# Altium PCB pcb.PcbDoc
Units mm, origin at the board's own origin, x right, y up, seen from the top; angles counter-clockwise.
Board outline 52.12 x 98.78 mm, 2 copper layers (Top Layer, Bottom Layer); 27 components, 29 nets, 152 pads, 14 vias.
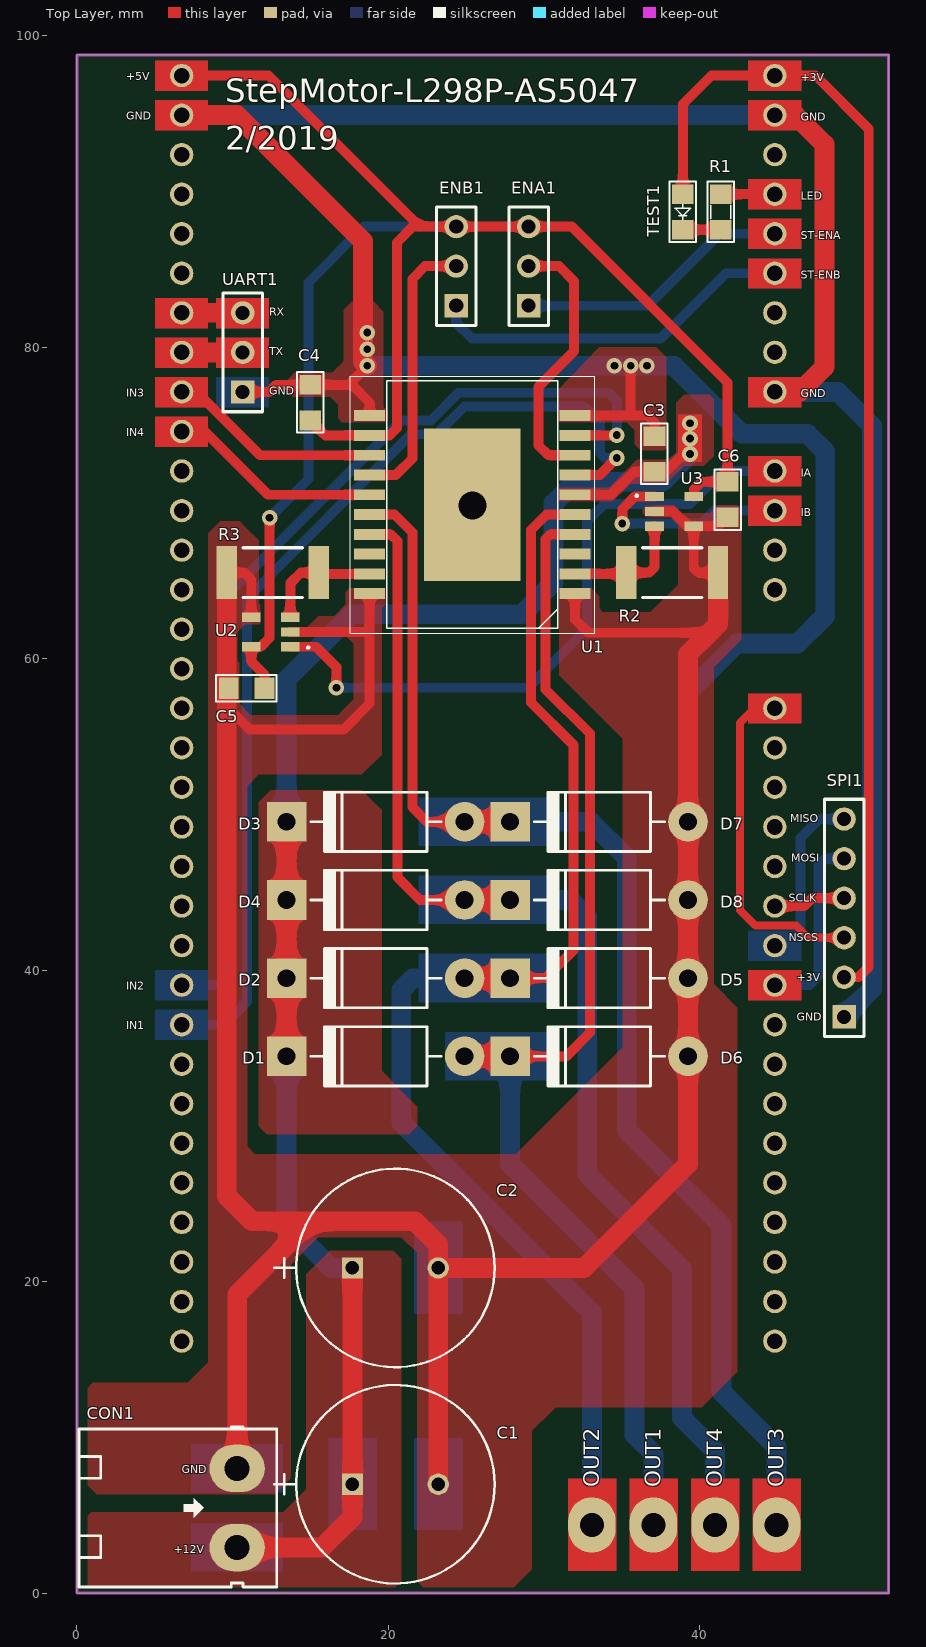
[diagram p0: Top Layer view]
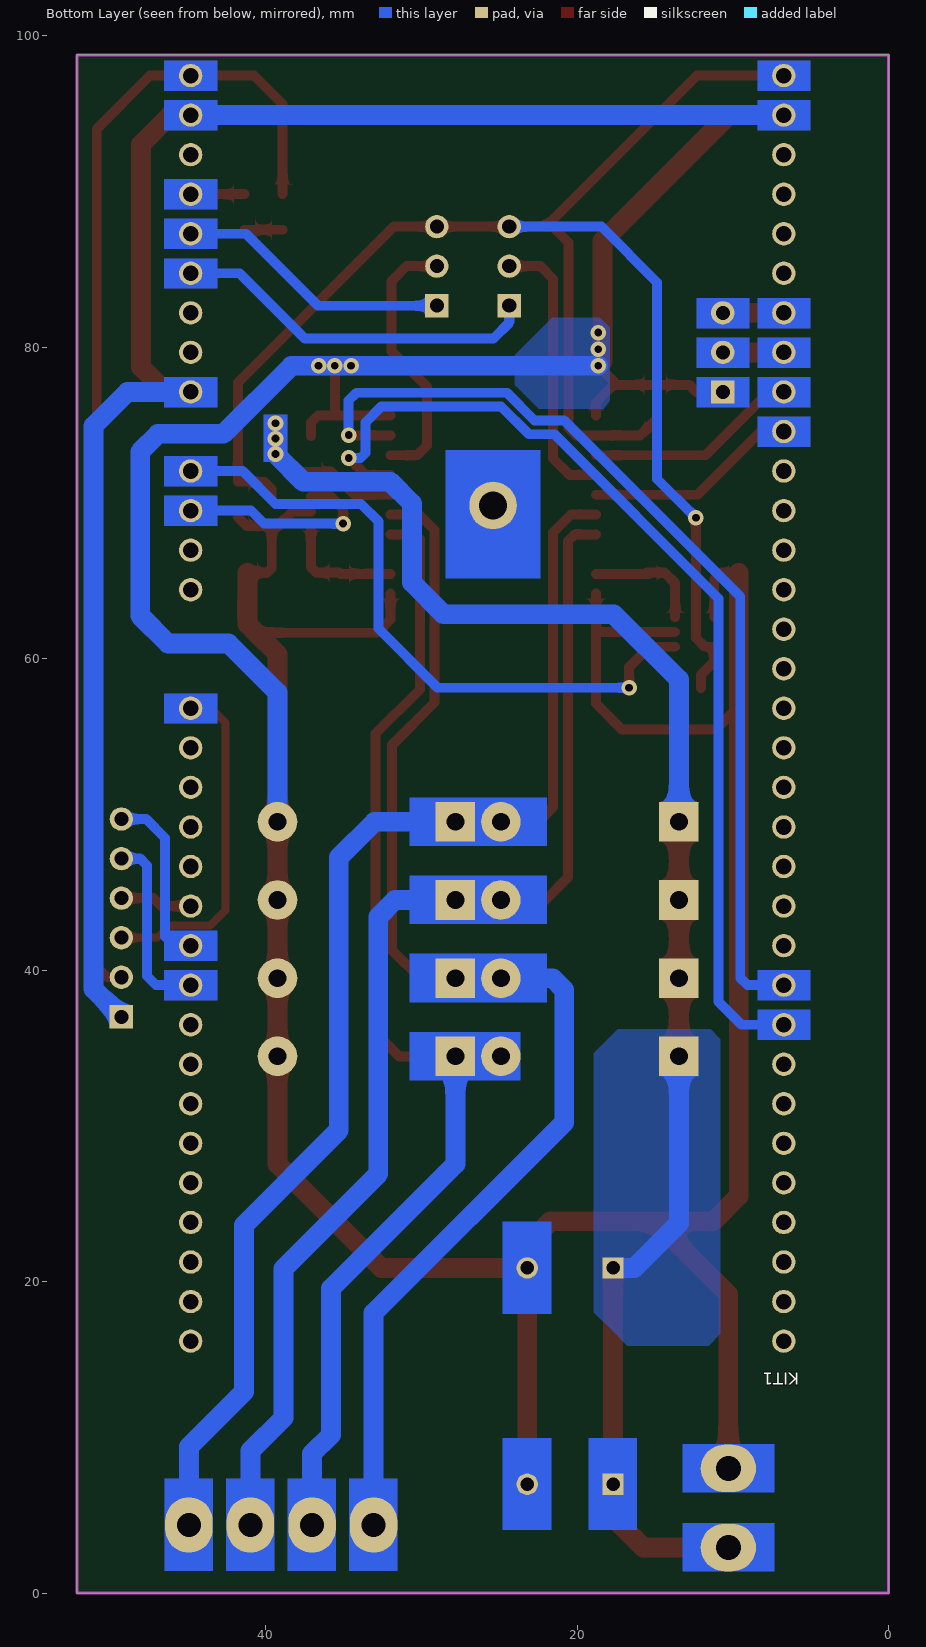
[diagram p1: Bottom Layer view, seen from below]
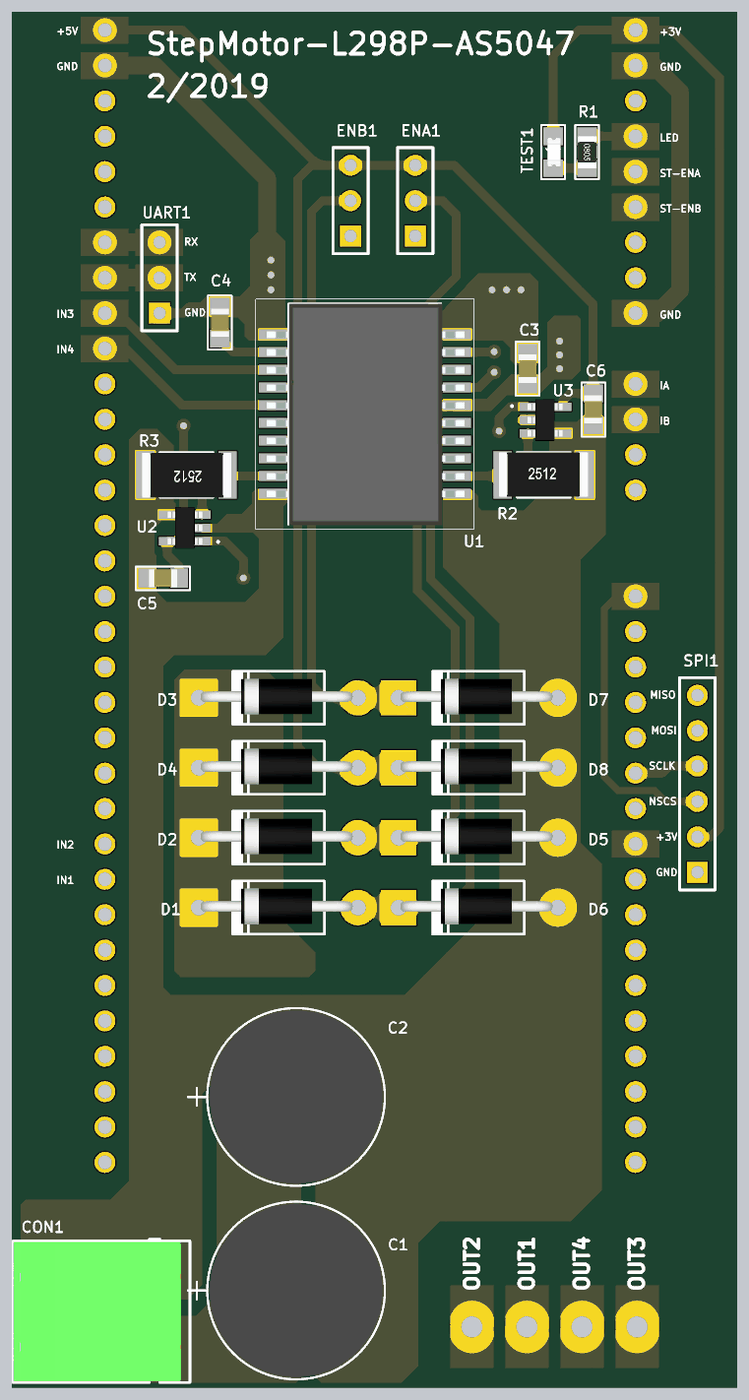
[diagram p2: 3D render of the assembled board from above, using the file's embedded part models]

## Layer stack, top to bottom
Top Solder: solder mask 0.0102, Solder Resist, Dk 3.5
Top Layer: signal copper 0.0356
Dielectric 1: dielectric 0.32, FR-4, Dk 4.8
Bottom Layer: signal copper 0.0356
Bottom Solder: solder mask 0.0102, Solder Resist, Dk 3.5

## Board outline
0,0 52.121,0 52.121,98.781 0,98.781

## Design rules (kind name [scope] priority, off if disabled: settings)
Clearance [All] p1: gap=0.254
PolygonConnect [All] p1: connectstyle=Direct reliefconductorwidth=0.254 reliefentries=4 polygonreliefangle="90 Angle" airgapwidth=0.254
RoutingVias [All] p1: holewidth=0.711 width=1.27 viastyle="Through Hole" minholewidth=0.5 minwidth=0.2 maxholewidth=1 maxwidth=2
SilkToSolderMaskClearance [IsPad] p1: minsilkscreentomaskgap=0.025 clearancetoexposedcopper=TRUE
SolderMaskExpansion [All] p1: expansion=0.102
Width [All] p1: maxlimit=2.54 minlimit=0.254 preferedwidth=0.508
29 further rules are at their usual default settings.

## Components (designator, comment, footprint, x,y, rotation, side; value= is the part's Value field where it differs from the comment)
C1 "390uF" "CAP_12.5 X 25" 20.447,6.985 r0 top
C2 "390uF" "CAP_12.5 X 25" 20.447,20.879 r0 top
C3 "104" TU_SMD_0805 37.084,73.152 r270 top
C4 "104" TU_SMD_0805 14.986,76.454 r270 top
C5 "104" TU_SMD_0805 10.897,58.115 r0 top
C6 "104" TU_SMD_0805 41.783,70.231 r90 top
CON1 "CON 2 EDG 5.08_MH" "CON 2 EDG 5.08" 10.287,5.461 r270 top
D1 "FR107" D2A 19.177,34.468 r180 top
D2 "FR107" D2A 19.177,39.489 r180 top
D3 "FR107" D2A 19.177,49.53 r180 top
D4 "FR107" D2A 19.177,44.509 r180 top
D5 "FR107" D2A 33.528,39.489 r180 top
D6 "FR107" D2A 33.528,34.468 r180 top
D7 "FR107" D2A 33.528,49.53 r180 top
D8 "FR107" D2A 33.528,44.509 r180 top
ENA1 "Jump 3" "Jump 3" 29.007,85.217 r90 top
ENB1 "Jump 3" "Jump 3" 24.359,85.217 r90 top
KIT1 "STM32F0DISCOVERY" STM32F0DISCOVERY 24.502,56.82 r270 bottom locked
R1 "1K" "Tro SMD 0805" 41.351,88.697 r270 top
R2 "0.002" 2512_R 38.227,65.532 r0 top
R3 "0.002" 2512_R 12.573,65.532 r180 top
SPI1 "Jump 6" "Jump 6" 49.267,43.358 r90 top
TEST1 "LED" LED_0805 38.913,88.697 r270 top
U1 "L298P" SOIC127P1420X360-21N 25.391,69.901 r180 top
U2 "INA180A" SOT95P280X145-5N 12.446,61.722 r180 top
U3 "INA180A" SOT95P280X145-5N 38.354,69.469 r0 top
UART1 "Jump 3" "Jump 3" 10.643,79.68 r90 top

## Footprints (in the part's own frame and the unit in brackets; to place one, negate y for a bottom-side part, rotate by r counter-clockwise, add the part's x,y. Pads: shape width x height; smd on the part's side, far side on the other; paste and mask are expansions set on the pad)
2512_R [mm] "Chip Resistor, Body 6.3x3.2mm, IPC Medium Density"
  rect 1.3x3.4 smd: 1(2.95,0) 2(-2.95,0)
  silkscreen extent -1.9,-1.6 1.9,1.6, body extent -3.23,-1.57 3.17,1.63, height 0.6
"CAP_12.5 X 25" [mil]
  rect 54x54 hole 34 mask-1000: 1(-108.5,0)
  round 54 hole 34 mask-1000: 2(108.5,0)
  silkscreen extent -306,-251 251,251, body extent -246,-246 245,246, height 984
"CON 2 EDG 5.08" [mil]
  oval 120x140 hole 62.99: 1(-100,0) 2(100,0)
  silkscreen extent -205,-400 200,100, body extent -197,-399 197,73, height 334
D2A [mil] "Diode 2A, W 150mil, L 450mil"
  round 100 hole 45: 1(-225,0)
  rect 100x100 hole 45: 2(225,0)
  silkscreen extent -166,-75 164,75, body extent -210,-54 220,47, height 100
"Jump 3" [mm] "Jump 3P 2.54"
  rect 1.5x1.5 hole 0.9: 1(-2.54,0)
  round 1.5 hole 0.9: 2(0,0) 3(2.54,0)
  silkscreen extent -3.81,-1.27 3.81,1.27, body extent -3.81,-1.27 3.81,1.27, height 7
"Jump 6" [mm]
  rect 1.5x1.5 hole 0.9: 1(-6.35,0)
  round 1.5 hole 0.9: 2(-3.81,0) 3(-1.27,0) 4(1.27,0) 5(3.81,0) 6(6.35,0)
  silkscreen extent -7.62,-1.27 7.62,1.27, body extent -7.62,-1.27 7.62,1.27, height 7
LED_0805 [mil]
  rect 50x55 smd: 1(-45,0) 2(45,0)
  silkscreen extent -77,-34 76,33, body extent -41,-16 41,20, height 33
SOIC127P1420X360-21N [mm]
  rect 2x0.7 smd: 1(-6.6,5.715) 2(-6.6,4.445) 3(-6.6,3.175) 4(-6.6,1.905) 5(-6.6,0.635) 6(-6.6,-0.635) 7(-6.6,-1.905) 8(-6.6,-3.175) 9(-6.6,-4.445) 10(-6.6,-5.715) 11(6.6,-5.715) 12(6.6,-4.445) 13(6.6,-3.175) 14(6.6,-1.905) 15(6.6,-0.635) 16(6.6,0.635) 17(6.6,1.905) 18(6.6,3.175) 19(6.6,4.445) 20(6.6,5.715)
  rect 6.2x9.8 smd: 21(0,0)
  silkscreen extent -7.85,-8.25 7.85,8.25, body extent -7.15,-7.92 7.05,7.98, height 3.6
SOT95P280X145-5N [mm]
  rect 1.21x0.59 smd: 1(-1.255,0.95) 2(-1.255,0) 3(-1.255,-0.95) 4(1.255,-0.95) 5(1.255,0.95)
  silkscreen extent -2.47,0.93 -2.33,1.07, body extent -1.28,-1.5 1.22,1.5, height 1.11
STM32F0DISCOVERY [mm]
  round 1.5 hole 1: 1(-40.64,-20.32) 2(-38.1,-20.32) 3(-35.56,-20.32) 4(-33.02,-20.32) 5(-30.48,-20.32) 6(-27.94,-20.32) 7(-25.4,-20.32) 8(-22.86,-20.32) 9(-20.32,-20.32) 11(-15.24,-20.32) 12(-12.7,-20.32) 13(-10.16,-20.32) 14(-7.62,-20.32) 17(0,-20.32) 18(2.54,-20.32) 19(5.08,-20.32) 20(7.62,-20.32) 21(10.16,-20.32) 22(12.7,-20.32) 23(15.24,-20.32) 24(17.78,-20.32) 25(20.32,-20.32) 26(22.86,-20.32) 27(25.4,-20.32) 28(27.94,-20.32) 29(30.48,-20.32) 30(33.02,-20.32) 31(35.56,-20.32) 32(38.1,-20.32) 33(40.64,-20.32) 34(-40.64,17.78) 35(-38.1,17.78) 36(-35.56,17.78) 37(-33.02,17.78) 38(-30.48,17.78) 39(-27.94,17.78) 40(-25.4,17.78) 41(-22.86,17.78) 42(-20.32,17.78) 43(-17.78,17.78) 44(-15.24,17.78) 45(-12.7,17.78) 46(-10.16,17.78) 47(-7.62,17.78) 48(-5.08,17.78) 49(-2.54,17.78) 50(0,17.78) 51(2.54,17.78) 52(5.08,17.78) 53(7.62,17.78) 54(10.16,17.78) 55(12.7,17.78) 56(15.24,17.78) 57(17.78,17.78) 58(20.32,17.78) 59(22.86,17.78) 60(25.4,17.78) 61(27.94,17.78) 62(30.48,17.78) 63(33.02,17.78) 64(35.56,17.78) 65(38.1,17.78) 66(40.64,17.78)
  body extent -41.88,-21.59 41.94,19.05, height 7
"Tro SMD 0805" [mil]
  rect 50x55 smd: 1(-45,0) 2(45,0)
  silkscreen extent -77,-34 76,33, body extent -45,-27 45,27, height 28
TU_SMD_0805 [mil]
  rect 50x55 smd: 1(-45,0) 2(45,0)
  silkscreen extent -77,-34 76,33, body extent -40,-25 40,25, height 24

## Part data
C1 C2: library part "Capacitor TuHoa", "CAP ALUM 390UF 20% 50V RADIAL"
C3 C4 C5 C6: library part "Capacitor 0805", "Ceramic Chip Capacitor - Standard"
CON1: "CON 2 EDG 5.08 (xanh cong)"
D1 D2 D3 D4 D5 D6 D7 D8: library part "Diode 1N4148 DO35 450mA 100V ( 1N4148 DIP)_MH", "Diode 1N4148 DO35 450mA 100V ( 1N4148 DIP)"
ENA1 ENB1 UART1: "Jump 3P 2.54"
R1 R2 R3: library part "R nho", "RES, 100, 1%, 0.1 W, 0402"
SPI1: "Jump 6P 2.54"
TEST1: library part "LED SMD_0805_MH", "LED 3mm"

## Free pads (board coordinates)
  round 3.048 hole 1.778: 0(25.4,69.85)
  oval 3.048x3.556 hole 1.524: 0(33.071,4.369) 0(37.025,4.369) 0(40.979,4.369) 0(44.933,4.369)

## Via types
v1: diameter 1, hole 0.5, Top Layer to Bottom Layer, tented both sides, 14 vias

## Nets (pads, with @x,y where several pads share a name; then routed paths per layer and width w, separated by ;. In a path a pad name is that pad's centre, name@x,y a point inside that pad or via, vN(x,y) a via of type N, cw(c..) or ccw(c..) an arc to the next point about the centre after c; other vN are vias at no path point)
+3V: KIT1.1 SPI1.2 TEST1.1 | length 75.6
  Top Layer w0.635: TEST1.1 38.913,95.631 40.742,97.46 KIT1.1 47.422,97.46 50.851,94.031 50.851,40.208 50.19,39.548 SPI1.2
+5V: C4.2 C5.2 C6.2 ENA1.3 ENB1.3 KIT1.34 U1.12 U2.5 U3.5 | length 111.7
  Top Layer w0.635: KIT1.34 12.294,97.46 21.996,87.757 ; C5.2 12.04,58.979 11.191,59.827 U2.5 11.801,60.772 12.368,61.339 v1(12.368,69.06) ; C4.2 15.951,74.346 U1.12 20.074,74.346 20.549,74.82 20.549,86.741 21.565,87.757 21.996,87.757 ; U3.5 39.609,70.876 40.107,71.374 C6.2 41.783,77.749 31.775,87.757 ENA1.3 ENB1.3 21.996,87.757
  Bottom Layer w0.635: v1(12.368,69.06) 14.859,71.552 14.859,84.176 18.44,87.757 ENB1.3
+12V: C1.1 C2.1 C3.2 CON1.2 D1.2 D2.2 D3.2 D4.2 U1.6 | length 111.8
  Top Layer w0.635: U1.6 34.29,70.536 35.763,72.009 C3.2 37.795,72.009 39.7,73.914 v1@39.7,75.133
  Top Layer w1.27: CON1.2 15.748,2.921 17.691,4.864 C1.1 C2.1 ; D1.2 D2.2 D4.2 D3.2
  Bottom Layer w0.635: v1@39.7,73.152 v1@39.7,75.133
  Bottom Layer w1.27: D1.2 13.462,23.749 16.332,20.879 C2.1 ; D3.2 13.462,58.674 17.653,62.865 28.575,62.865 30.607,64.897 30.607,69.977 32.004,71.374 37.592,71.374 v1(39.37,73.152)
  other v1: 39.37,74.143 39.37,75.133
ENA: ENA1.2 U1.8 | length 17.4
  Top Layer w0.635: ENA1.2 30.963,85.217 31.928,84.252 31.928,79.756 29.642,77.47 29.642,73.711 30.277,73.076 U1.8
ENB: ENB1.2 U1.14 | length 17.9
  Top Layer w0.635: U1.14 20.472,71.806 21.539,72.873 21.539,84.404 22.352,85.217 ENB1.2
EP: pad.0@25.4,69.85 U1.21
GND: C1.2 C2.2 C3.1 C4.1 C5.1 C6.1 CON1.1 D5.1 D6.1 D7.1 D8.1 KIT1.2 KIT1.9 KIT1.35 R2.1 R3.1 SPI1.1 U1.1 U1.10 U1.11 U1.20 U2.2 U2.4 U3.2 U3.4 UART1.1 | length 405.2
  Top Layer w0.635: R3.1 10.744,65.532 11.191,65.085 U2.4 ; C5.1 9.754,56.794 11.079,55.469 17.135,55.469 18.791,57.125 18.791,61.849 ; UART1.1 12.344,77.14 12.802,77.597 C4.1 17.653,77.597 ; U2.2 18.664,61.722 18.791,61.849 ; v1(18.644,78.816) 17.653,77.826 17.653,77.597 ; U1.20 18.791,61.849 ; U1.11 18.791,76.459 17.653,77.597 ; U1.1 31.991,62.522 32.842,61.671 40.615,61.671 ; U1.10 36.652,75.616 37.084,75.184 C3.1 ; 35.56,75.641 v1(35.56,78.816) ; U3.2 38.278,69.469 39.228,68.519 U3.4 ; R2.1 39.903,65.532 39.609,65.826 U3.4 ; C6.1 41.214,68.519 U3.4
  Top Layer w1.27: KIT1.35 10.262,94.92 18.364,86.817 18.364,79.096 v1(18.644,78.816) ; R3.1 9.623,25.505 11.252,23.876 14.986,23.876 ; CON1.1 10.287,19.177 14.986,23.876 ; C1.2 C2.2 ; R2.1 41.177,62.234 40.615,61.671 39.243,60.3 D7.1 D8.1 D5.1 D6.1 39.243,27.559 32.563,20.879 C2.2 ; KIT1.9 46.406,77.14 48.006,78.74 48.006,93.04 46.126,94.92 KIT1.2 ; 14.986,23.876 21.717,23.876 23.203,22.39 C2.2
  Bottom Layer w1.27: KIT1.35 KIT1.2 ; v1(18.644,78.816) v1(34.519,78.816) v1(35.56,78.816) v1(36.601,78.816) 38.354,78.816 42.723,74.447 46.914,74.447 48.057,73.304 48.057,62.763 46.279,60.985 42.393,60.985 39.243,57.836 D7.1 ; KIT1.9 48.87,77.14 51.054,74.955 51.054,38.795 SPI1.1
  other v1: 18.644,79.883 18.644,80.95
IA: KIT1.11 U2.1 | length 42.8
  Top Layer w0.635: U2.1 15.352,60.772 16.662,59.461 v1(16.662,58.141)
  Bottom Layer w0.635: v1(16.662,58.141) 28.956,58.141 32.766,61.951 32.766,68.834 33.884,69.952 39.37,69.952 41.478,72.06 KIT1.11
IB: KIT1.12 U3.1 | length 13.5
  Top Layer w0.635: v1(35.027,68.682) 35.027,69.621 35.824,70.419 U3.1
  Bottom Layer w0.635: v1(35.027,68.682) 40.107,68.682 40.945,69.52 KIT1.12
IN1: KIT1.58 U1.7 | length 65.2
  Top Layer w0.635: U1.7 33.579,71.806 v1(34.671,72.898)
  Bottom Layer w0.635: KIT1.58 9.449,36.5 10.922,37.973 10.922,63.881 21.463,74.422 23.101,74.422 24.879,76.2 32.58,76.2 33.599,75.18 33.599,73.208 33.909,72.898 v1(34.671,72.898)
IN2: KIT1.57 U1.9 | length 63.2
  Top Layer w0.635: U1.9 34.646,74.346 v1(34.671,74.371)
  Bottom Layer w0.635: KIT1.57 9.068,39.04 9.525,39.497 9.525,64.008 20.828,75.311 22.733,75.311 24.511,77.089 34.163,77.089 34.671,76.581 v1(34.671,74.371)
IN3: KIT1.42 U1.13 | length 13.8
  Top Layer w0.635: KIT1.42 7.696,77.14 11.76,73.076 U1.13
IN4: KIT1.43 U1.15 | length 13.8
  Top Layer w0.635: KIT1.43 8.204,74.6 12.268,70.536 U1.15
MISO: KIT1.23 SPI1.6 | length 11.5
  Bottom Layer w0.635: KIT1.23 45.872,41.58 46.457,42.164 46.457,48.489 47.676,49.708 SPI1.6
MOSI: KIT1.24 SPI1.5 | length 12
  Bottom Layer w0.635: KIT1.24 47.041,39.04 47.625,39.624 47.625,46.736 48.057,47.168 SPI1.5
NetKIT1_4: KIT1.4 R1.1 | length 3.5
  Top Layer w0.635: R1.1 KIT1.4
NetR1_2: R1.2 TEST1.2 | length 2.4
  Top Layer w0.635: TEST1.2 R1.2
NSCS_AS: KIT1.17 SPI1.3 | length 22.1
  Top Layer w0.508: KIT1.17 43.51,56.82 42.57,55.88 42.57,43.866 43.574,42.862 46.191,42.862 46.965,42.088 SPI1.3
OUT1: D1.1 D6.2 pad.0@37.025,4.369 U1.4 | length 77.5
  Top Layer w0.635: D6.2 31.42,34.468 32.944,35.992 32.944,55.194 30.099,58.039 30.099,67.691 30.404,67.996 U1.4
  Top Layer w1.27: D1.1 D6.2
  Bottom Layer w1.27: D6.2 27.813,27.559 35.814,19.558 35.814,10.16 37.025,8.949 pad.0@37.025,4.369
OUT2: D2.1 D5.2 pad.0@33.071,4.369 U1.5 | length 82.9
  Top Layer w0.635: D5.2 30.091,39.489 31.877,41.275 31.877,54.483 29.159,57.201 29.159,68.275 30.15,69.266 U1.5
  Top Layer w1.27: D2.1 D5.2
  Bottom Layer w1.27: D2.1 21.582,39.489 20.828,38.735 20.828,30.226 33.071,17.983 pad.0@33.071,4.369
OUT3: D3.1 D7.2 pad.0@44.933,4.369 U1.16 | length 82.8
  Top Layer w0.635: U1.16 20.396,69.266 21.539,68.123 21.539,50.47 22.479,49.53 D3.1
  Top Layer w1.27: D3.1 D7.2
  Bottom Layer w1.27: D7.2 33.02,49.53 35.306,47.244 35.306,29.718 41.402,23.622 41.402,12.929 44.933,9.398 pad.0@44.933,4.369
OUT4: D4.1 D8.2 pad.0@40.979,4.369 U1.17 | length 79.3
  Top Layer w0.635: U1.17 20.142,67.996 20.574,67.564 20.574,45.974 22.039,44.509 D4.1
  Top Layer w1.27: D4.1 D8.2
  Bottom Layer w1.27: D8.2 31.691,44.509 32.766,43.434 32.766,26.924 38.862,20.828 38.862,11.252 40.979,9.136 pad.0@40.979,4.369
RX: KIT1.40 UART1.3 | length 3.9
  Top Layer w1.27: KIT1.40 UART1.3
SCLK: KIT1.22 SPI1.4 | length 4.7
  Top Layer w0.635: KIT1.22 46.711,44.12 47.219,44.628 SPI1.4
SENA: R2.2 U1.2 U3.3 | length 7.9
  Top Layer w0.635: U1.2 35.201,65.456 R2.2 36.754,65.532 37.099,65.877 U3.3
SENB: R3.2 U1.19 U2.3 | length 7.8
  Top Layer w0.254: R3.2@15.291,65.532 R3.2@15.367,65.456
  Top Layer w0.635: U2.3 13.701,64.857 14.376,65.532 15.291,65.532 R3.2 ; R3.2@15.367,65.456 U1.19
ST_ENA: ENA1.1 KIT1.5 | length 17.7
  Bottom Layer w0.635: ENA1.1 36.652,82.677 41.275,87.3 KIT1.5
ST_ENB: ENB1.1 KIT1.6 | length 23.7
  Bottom Layer w0.635: ENB1.1 24.359,81.585 25.375,80.569 37.49,80.569 41.681,84.76 KIT1.6
TX: KIT1.41 UART1.2 | length 3.9
  Top Layer w1.27: KIT1.41 UART1.2
pads on no net: KIT1.3 KIT1.7 KIT1.8 KIT1.13 KIT1.14 KIT1.18 KIT1.19 KIT1.20 KIT1.21 KIT1.25 KIT1.26 KIT1.27 KIT1.28 KIT1.29 KIT1.30 KIT1.31 KIT1.32 KIT1.33 KIT1.36 KIT1.37 KIT1.38 KIT1.39 KIT1.44 KIT1.45 KIT1.46 KIT1.47 KIT1.48 KIT1.49 KIT1.50 KIT1.51 KIT1.52 KIT1.53 KIT1.54 KIT1.55 KIT1.56 KIT1.59 KIT1.60 KIT1.61 KIT1.62 KIT1.63 KIT1.64 KIT1.65 KIT1.66 U1.3 U1.18

## Polygon pours and split planes (outlines as drawn)
GND on Top Layer "Bottom Layer-No Net" (solid, pour order 22): 33.528,80.01 37.211,80.01 37.846,79.375 37.846,76.073 37.846,73.533 37.719,73.406 36.195,73.406 36.068,73.533 35.814,73.787 35.814,74.676 35.56,74.93 35.306,75.184 33.401,75.184 31.496,75.184 31.115,75.184 30.988,75.184 30.861,75.311 30.861,75.438 30.861,77.216
GND on Top Layer "Bottom Layer-No Net" (solid, pour order 18): 17.653,75.184 17.78,75.184 19.812,75.184 19.939,75.311 19.939,75.946 19.685,76.2 19.685,78.74 19.685,82.296 19.05,82.931 17.653,82.931 17.145,82.423 17.145,80.137 17.145,79.121 16.383,78.359 14.986,78.359 13.97,78.359 13.589,77.978 13.462,77.851 13.462,77.216 13.843,76.835 15.367,76.835 16.256,76.835 16.51,76.581 16.764,76.327 16.764,75.438 17.018,75.184 17.399,75.184
+12V on Top Layer "Bottom Layer-No Net" (solid, pour order 14): 30.861,70.866 30.988,70.993 34.163,70.993 34.29,71.12 35.941,72.771 37.846,72.771 37.973,72.771 38.481,73.279 38.481,75.946 38.481,76.454 38.989,76.962 40.64,76.962 40.894,76.708 40.894,73.533 40.894,73.025 40.513,72.644 40.259,72.39 39.624,72.39 38.989,72.39 38.481,71.882 37.846,71.247 36.703,71.247 35.56,71.247 35.306,70.993 34.417,70.104 32.766,70.104 30.988,70.104 30.861,70.231
+12V on Top Layer "Bottom Layer-No Net" (solid, pour order 12): 11.684,50.8 12.446,51.562 17.272,51.562 18.288,51.562 19.304,50.546 19.558,50.292 19.558,47.498 19.558,33.528 21.59,31.496 21.844,31.242 21.844,30.226 21.844,29.972 21.336,29.464 12.7,29.464 12.192,29.464 11.684,29.972
+12V on Top Layer "Bottom Layer-No Net" (solid, pour order 8): 0.686,3.429 0.686,0.178 0.737,0.127 1.067,0.127 18.339,0.127 20.193,0.127 20.828,0.762 20.828,8.255 20.828,14.478 20.828,21.463 20.32,21.971 16.84,21.971 16.231,21.971 14.783,20.523 14.732,20.472 14.732,18.948 14.732,6.68 13.36,5.309 13.233,5.182 3.632,5.182 0.914,5.182 0.686,4.953
GND on Top Layer "Bottom Layer-No Net" (solid, pour order 6): 0.686,13.157 0.686,6.934 1.27,6.35 9.398,6.35 12.7,6.35 13.716,7.366 13.716,19.812 13.716,21.082 15.494,22.86 20.828,22.86 21.844,21.844 21.844,11.684 21.844,0.762 22.352,0.254 23.876,0.254 27.94,0.254 28.702,1.016 29.21,1.524 29.21,8.89 29.21,10.414 30.48,11.684 30.734,11.938 40.132,11.938 41.656,13.462 42.418,14.224 42.418,29.464 42.418,37.592 40.894,39.116 40.894,41.656 40.894,59.436 42.672,61.214 42.672,64.262 42.672,69.596 42.418,69.85 41.148,69.85 40.64,69.342 39.116,69.342 38.862,69.342 38.354,69.85 36.83,69.85 36.576,69.85 36.322,69.596 36.322,69.342 36.576,69.088 38.1,69.088 38.608,68.58 38.608,65.278 38.608,64.77 36.83,62.992 33.782,62.992 33.528,63.246 33.528,64.008 33.02,64.516 32.004,64.516 30.988,64.516 30.988,59.944 30.988,58.928 32.766,57.15 35.052,54.864 35.052,38.1 35.052,35.052 28.194,28.194 12.446,28.194 11.43,28.194 10.922,28.702 10.922,35.56 10.922,51.816 11.684,52.578 14.224,52.578 18.288,52.578 19.558,53.848 19.558,55.118 19.558,58.42 19.558,60.706 19.558,63.246 19.812,63.5 19.812,64.516 17.526,64.516 17.272,64.262 17.272,63.5 16.51,62.738 15.494,62.738 14.732,61.976 13.208,61.976 13.208,61.468 17.272,61.468 17.78,60.96 17.78,57.404 17.018,56.642 16.764,56.388 12.446,56.388 11.176,56.388 10.414,57.15 10.414,59.69 10.414,59.741 10.287,59.868 10.287,60.706 10.287,61.697 10.719,62.128 10.82,62.23 11.684,62.23 11.76,62.23 11.836,62.306 11.836,62.992 11.836,63.424 11.684,63.576 11.659,63.602 11.659,67.386 11.659,67.615 10.82,68.453 10.439,68.834 9.576,68.834 9.195,68.834 8.712,68.351 8.433,68.072 8.433,65.71 8.433,14.834 7.976,14.376 7.112,13.513 1.016,13.513
GND on Bottom Layer "Bottom Layer-No Net" (solid, pour order 20): 17.907,81.153 17.907,81.28 18.542,81.915 21.082,81.915 21.59,81.915 24.003,79.502 24.003,77.724 24.003,77.597 23.114,76.708 22.479,76.073 18.288,76.073 17.907,76.581
+12V on Bottom Layer "Bottom Layer-No Net" (solid, pour order 16): 10.795,35.56 11.43,36.195 17.399,36.195 18.923,34.671 18.923,33.909 18.923,18.034 17.653,16.764 16.764,15.875 11.684,15.875 11.557,15.875 10.795,16.637

## Keep-outs
Keep-Out Layer:
  the board outline again, w0.203

## Other copper
Top Layer:
  rectangle net +12V: 38.608,72.644 40.132,75.692
  rectangle net IB: 43.095,68.529 46.524,70.485
  rectangle net IA: 43.095,71.069 46.524,73.025
  rectangle net +3V: 43.095,96.469 46.524,98.425
  rectangle net GND: 43.095,93.929 46.524,95.885
  rectangle net NetKIT1_4: 43.095,88.849 46.524,90.805
  rectangle net ST_ENA: 43.095,86.309 46.524,88.265
  rectangle net ST_ENB: 43.095,83.769 46.524,85.725
  rectangle net GND: 43.095,76.149 46.524,78.105
  rectangle net NSCS_AS: 43.095,55.829 46.524,57.785
  rectangle net MOSI: 43.095,38.049 46.524,40.005
  rectangle net IN4: 4.995,73.609 8.424,75.565
  rectangle net IN3: 4.995,76.149 8.424,78.105
  rectangle net TX: 8.915,78.689 12.344,80.645
  rectangle net TX: 4.995,78.689 8.424,80.645
  rectangle net RX: 8.915,81.229 12.344,83.185
  rectangle net RX: 4.995,81.229 8.424,83.185
  rectangle net GND: 4.995,93.929 8.424,95.885
  rectangle net +5V: 4.995,96.469 8.424,98.425
  region net OUT2: 34.646,1.422 34.646,7.341 31.521,7.341 31.521,1.422
  region net OUT1: 38.6,1.422 38.6,7.341 35.475,7.341 35.475,1.422
  region net OUT4: 42.553,1.422 42.553,7.341 39.429,7.341 39.429,1.422
  region net OUT3: 46.507,1.422 46.507,7.341 43.383,7.341 43.383,1.422
Bottom Layer:
  region net EP: 28.448,65.151 28.448,73.406 22.352,73.406 22.352,65.151
  region net OUT1: 30.759,36.043 23.622,36.043 23.622,32.918 30.759,32.918
  region net OUT2: 30.759,41.063 24.841,41.063 24.841,37.939 30.759,37.939
  region net OUT2: 27.838,41.063 21.92,41.063 21.92,37.939 27.838,37.939
  region net OUT4: 30.759,46.084 24.841,46.084 24.841,42.96 30.759,42.96
  region net OUT4: 27.838,46.084 21.92,46.084 21.92,42.96 27.838,42.96
  region net OUT3: 30.759,51.105 24.841,51.105 24.841,47.981 30.759,47.981
  region net OUT3: 27.838,51.105 21.92,51.105 21.92,47.981 27.838,47.981
  region net +12V: 13.233,4.496 7.315,4.496 7.315,1.372 13.233,1.372
  region net GND: 13.233,9.576 7.315,9.576 7.315,6.452 13.233,6.452
  region net +12V: 19.266,4.039 19.266,9.957 16.142,9.957 16.142,4.039
  region net GND: 24.778,4.039 24.778,9.957 21.654,9.957 21.654,4.039
  region net GND: 24.778,17.932 24.778,23.851 21.654,23.851 21.654,17.932
  rectangle net +12V: 38.608,72.644 40.132,75.692
  rectangle net IB: 43.095,68.529 46.524,70.485
  rectangle net IA: 43.095,71.069 46.524,73.025
  region net OUT3: 46.507,1.422 46.507,7.341 43.383,7.341 43.383,1.422
  region net OUT4: 42.553,1.422 42.553,7.341 39.429,7.341 39.429,1.422
  region net OUT1: 38.6,1.422 38.6,7.341 35.475,7.341 35.475,1.422
  region net OUT2: 34.646,1.422 34.646,7.341 31.521,7.341 31.521,1.422
  rectangle net MISO: 43.095,40.589 46.524,42.545
  rectangle net MOSI: 43.095,38.049 46.524,40.005
  rectangle net NSCS_AS: 43.095,55.829 46.524,57.785
  rectangle net GND: 43.095,76.149 46.524,78.105
  rectangle net ST_ENB: 43.095,83.769 46.524,85.725
  rectangle net ST_ENA: 43.095,86.309 46.524,88.265
  rectangle net NetKIT1_4: 43.095,88.849 46.524,90.805
  rectangle net GND: 43.095,93.929 46.524,95.885
  rectangle net +3V: 43.095,96.469 46.524,98.425
  rectangle net IN1: 4.995,35.509 8.424,37.465
  rectangle net IN2: 4.995,38.049 8.424,40.005
  rectangle net IN4: 4.995,73.609 8.424,75.565
  rectangle net IN3: 4.995,76.149 8.424,78.105
  rectangle net GND: 8.915,76.149 12.344,78.105
  rectangle net TX: 4.995,78.689 8.424,80.645
  rectangle net TX: 8.915,78.689 12.344,80.645
  rectangle net RX: 8.915,81.229 12.344,83.185
  rectangle net RX: 4.995,81.229 8.424,83.185
  rectangle net GND: 4.995,93.929 8.424,95.885
  rectangle net +5V: 4.995,96.469 8.424,98.425

## Silkscreen, mask and mechanical layers (free items; w line width, h text height)
Top Overlay:
  text "+5V" at 3.175,97.155 h0.51
  text "+3V" at 46.491,97.104 h0.51
  text "StepMotor-L298P-AS5047" at 9.525,95.758 h1.52
  text "GND" at 3.175,94.615 h0.51
  text "GND" at 46.491,94.564 h0.51
  text "2/2019" at 9.525,92.71 h1.52
  text "LED" at 46.491,89.484 h0.51
  text "ST-ENA" at 46.491,86.944 h0.51
  text "ST-ENB" at 46.491,84.404 h0.51
  text "RX" at 12.344,82.029 h0.51
  text "TX" at 12.344,79.489 h0.51
  text "GND" at 12.344,76.949 h0.51
  text "IN3" at 3.175,76.835 h0.51
  text "GND" at 46.491,76.784 h0.51
  text "IN4" at 3.175,74.295 h0.51
  text "IA" at 46.491,71.704 h0.51
  text "IB" at 46.491,69.164 h0.51
  text "MISO" at 45.796,49.505 h0.51
  text "MOSI" at 45.88,46.954 h0.51
  text "SCLK" at 45.711,44.404 h0.51
  text "NSCS" at 45.711,41.854 h0.51
  text "+3V" at 46.219,39.304 h0.51
  text "IN2" at 3.175,38.735 h0.51
  text "GND" at 46.219,36.754 h0.51
  text "IN1" at 3.175,36.195 h0.51
  text "GND" at 6.74,7.696 h0.51
  text "OUT2" at 33.553,6.807 h1.02 r90
  text "OUT1" at 37.499,6.807 h1.02 r90
  text "OUT4" at 41.444,6.807 h1.02 r90
  text "OUT3" at 45.39,6.807 h1.02 r90
  text "+12V" at 6.223,2.54 h0.51
Bottom Solder:
  region: 28.448,65.151 28.448,73.406 22.352,73.406 22.352,65.151